# Altium PCB Main_Test.PcbDoc
Units mm, origin at the board's own origin, x right, y up, seen from the top; angles counter-clockwise.
Board outline 57 x 48 mm, 2 copper layers (Top Layer, Bottom Layer), stack 1.569 mm thick; 34 components, 29 nets, 164 pads, 0 vias.
Unrouted connection lines stored in the file: 11.
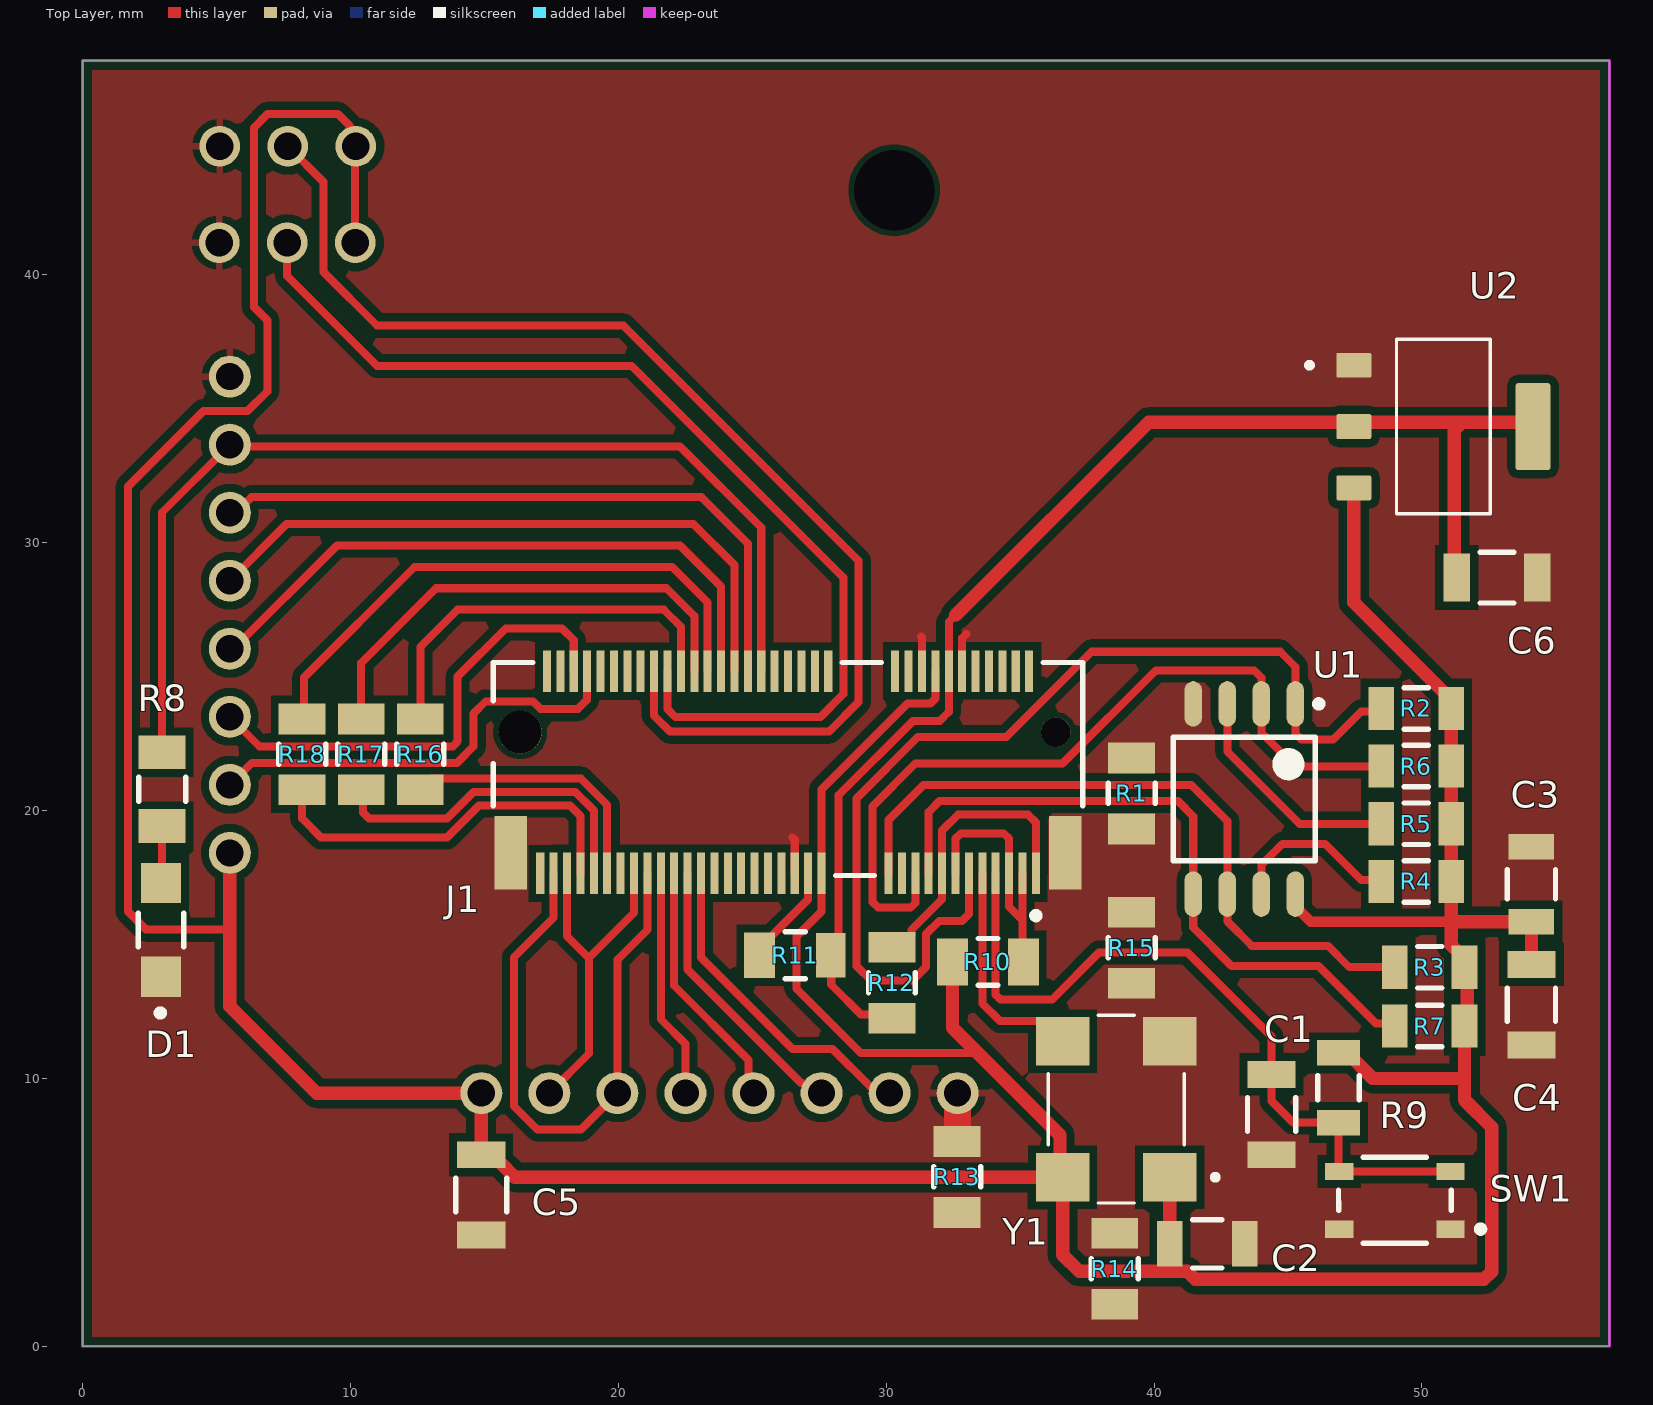
[diagram p0: Top Layer view]
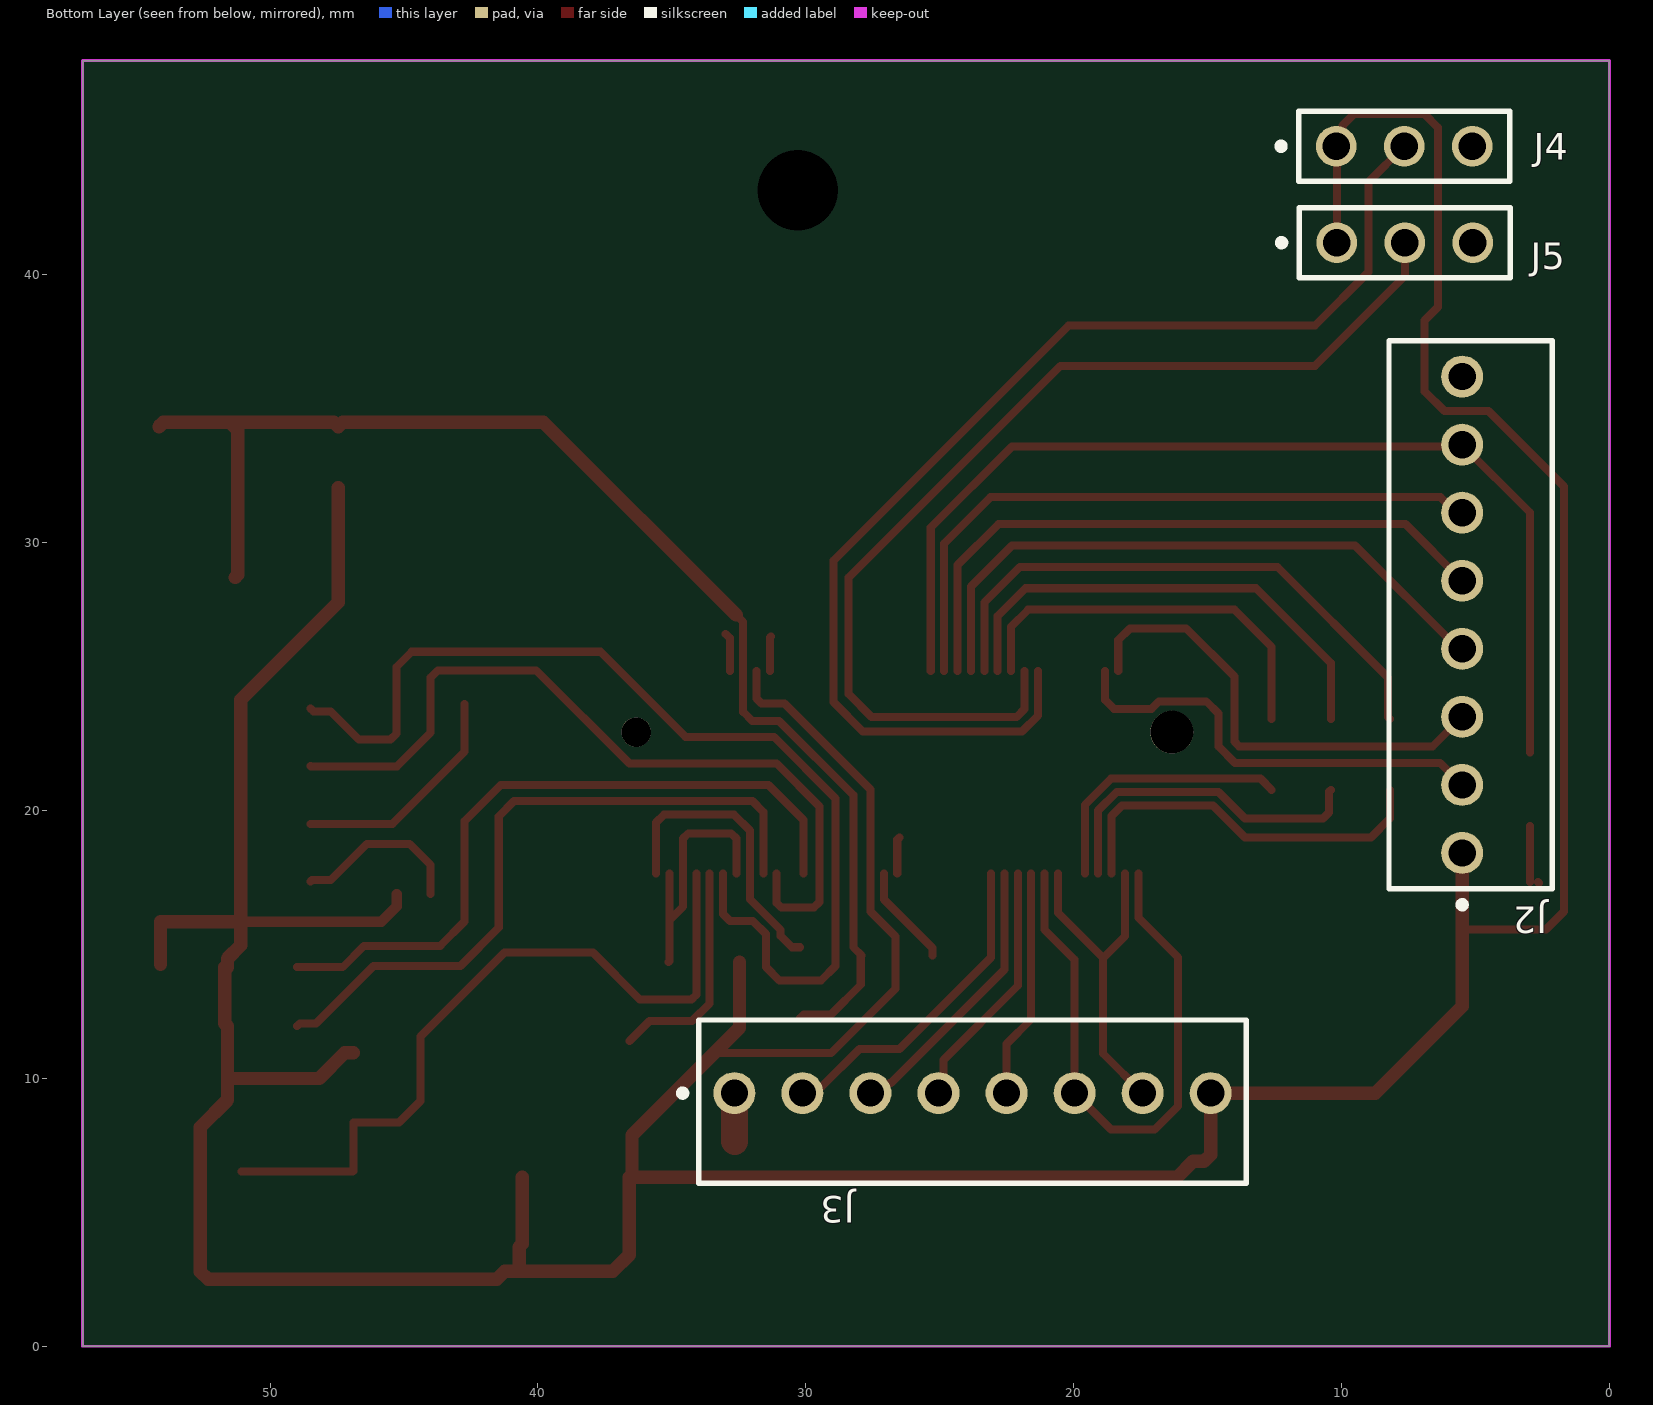
[diagram p1: Bottom Layer view, seen from below]
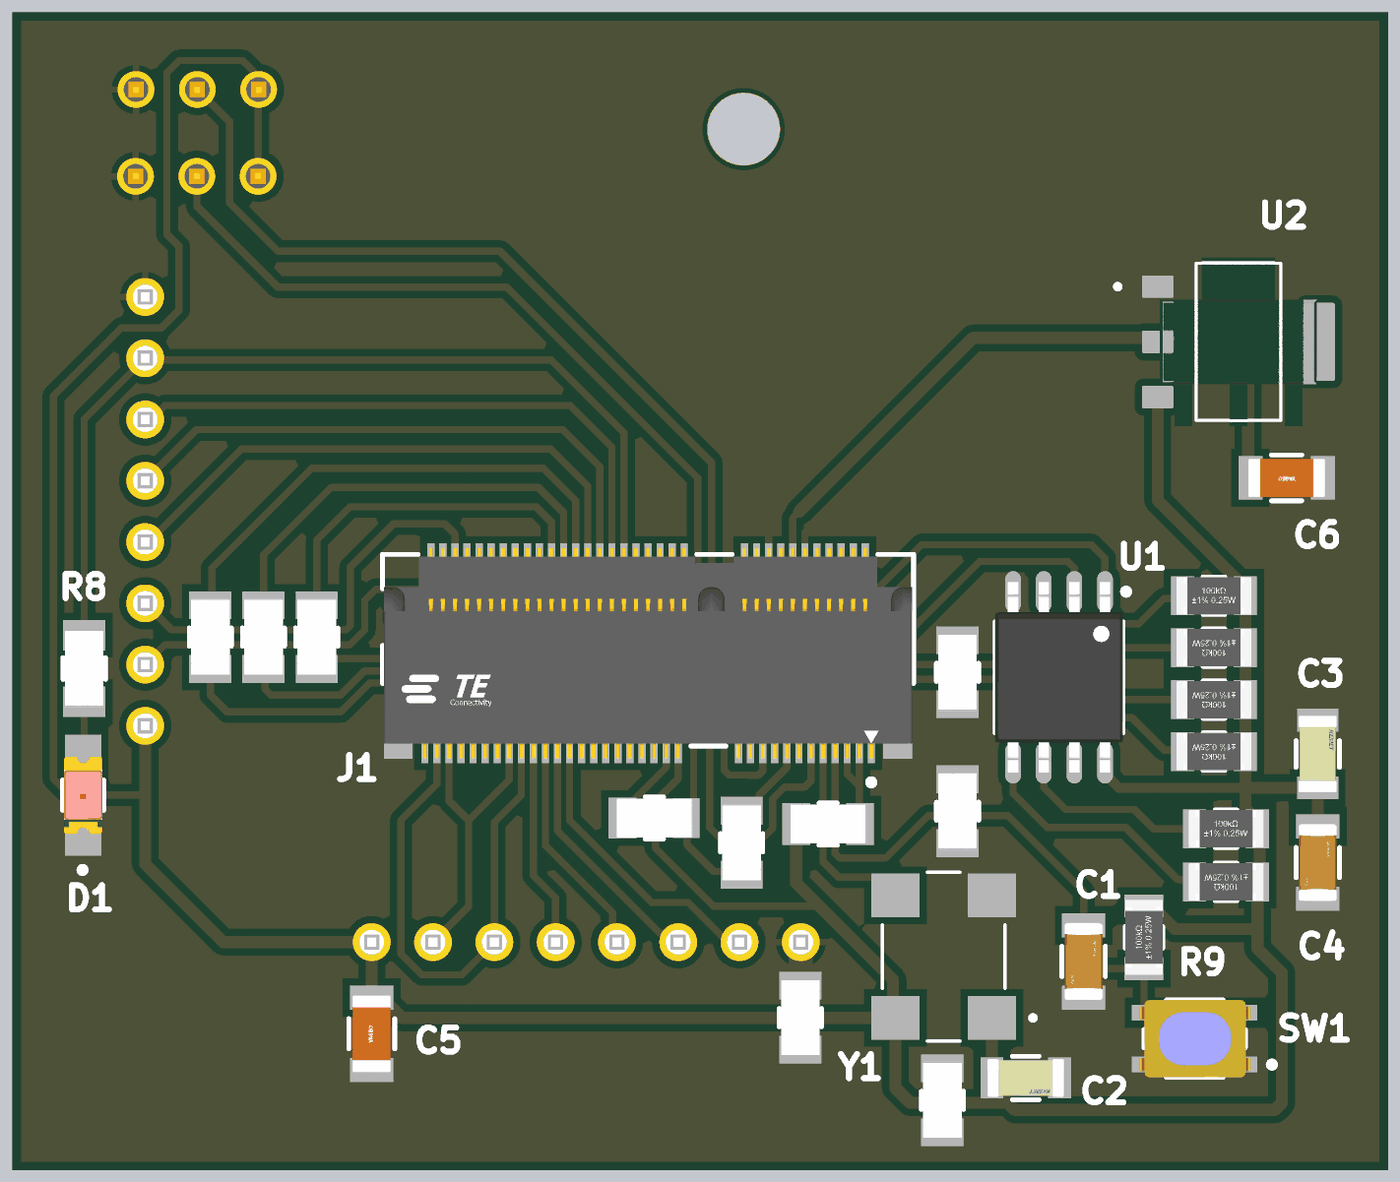
[diagram p2: 3D render of the assembled board from above, using the file's embedded part models]
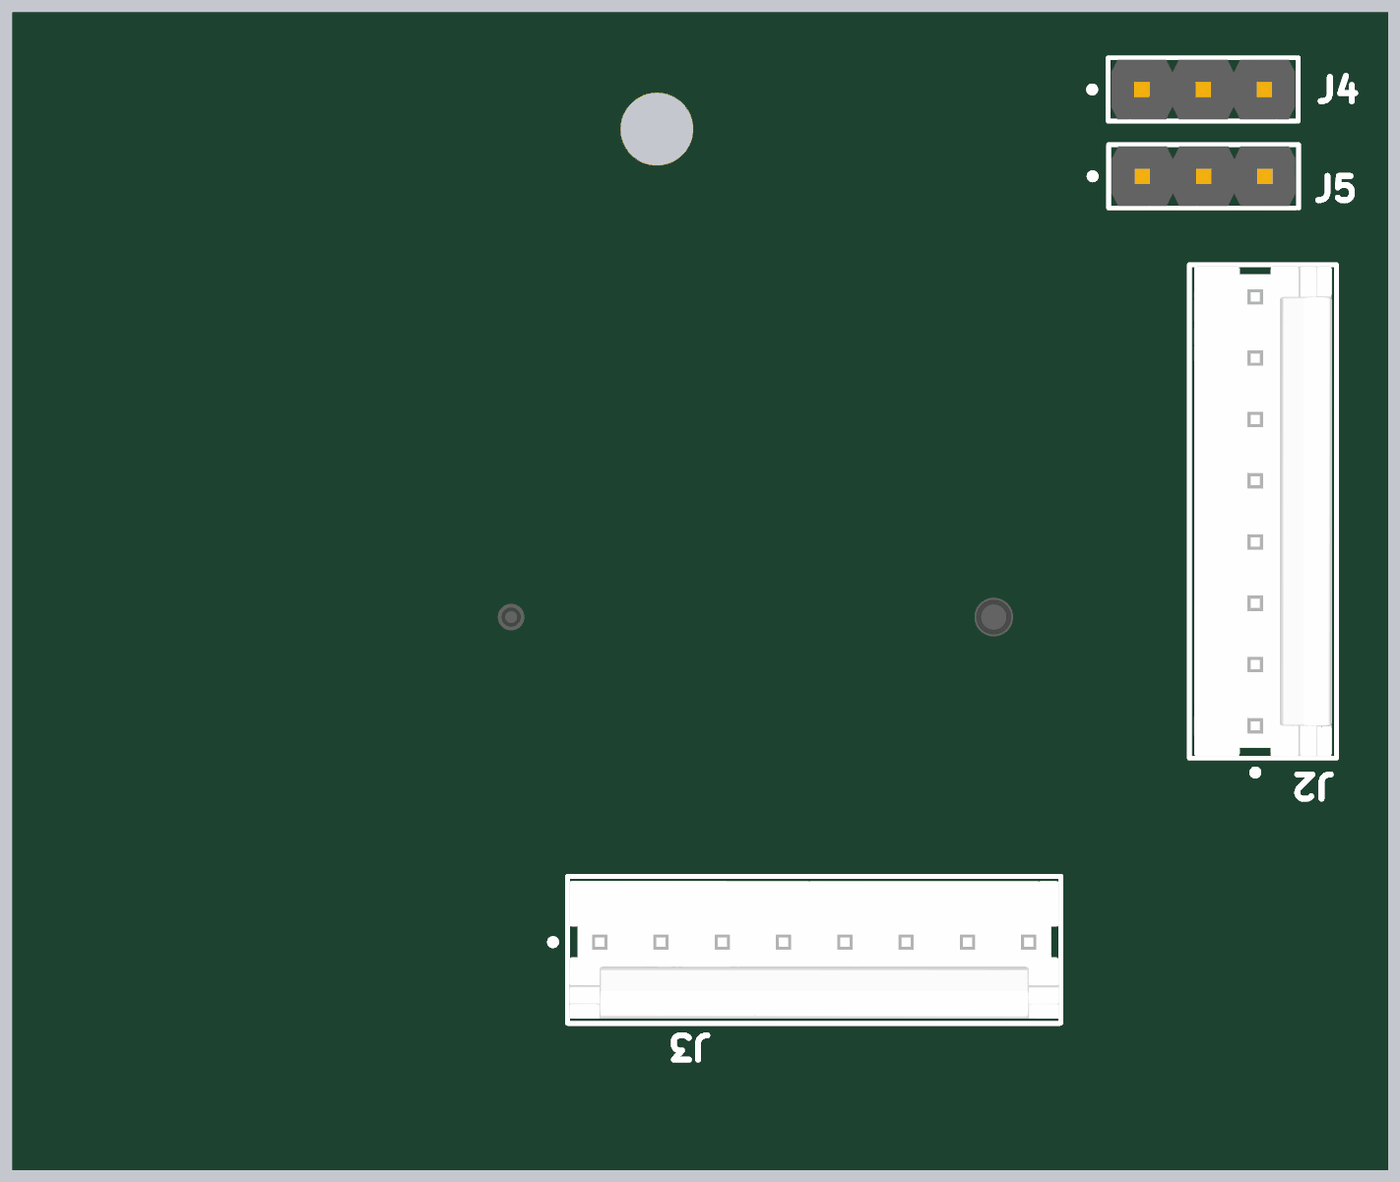
[diagram p3: 3D render of the assembled board from below, using the file's embedded part models]

## Layer stack, top to bottom
Top Solder: solder mask 0.0254, SM-002, Dk 4
Top Layer: signal copper 0.035
Dielectric 1: core 1.4986, Core-043, Dk 4.3
Bottom Layer: signal copper 0.035
Bottom Solder: solder mask 0.0254, SM-002, Dk 4

## Board outline
0,0 57,0 57,48 0,48

## Design rules (kind name [scope] priority, off if disabled: settings)
BoardOutlineClearance Clearance_Edge [All] p1: gap=0.254 ignorepadtopadclearanceinfootprint=FALSE except(0: Arc-SplitContinuation Track-SplitContinuation SMDPad-SplitContinuation THPad-SplitContinuation Via-SplitContinuation Fill-OutlineEdge Fill-CavityEdge Fill-CutoutEdge Fill-SplitBarrior Fill-SplitContinuation Poly-OutlineEdge Poly-CavityEdge Poly-CutoutEdge Poly-SplitBarrior Poly-SplitContinuation Region-OutlineEdge Region-CavityEdge Region-CutoutEdge Region-SplitBarrior Region-SplitContinuation Text-SplitContinuation)
Clearance [All] p1: gap=0.2 ignorepadtopadclearanceinfootprint=FALSE except(0.3: Arc-Fill Arc-Poly Arc-Region Track-Fill Track-Poly Track-Region SMDPad-Fill SMDPad-Poly SMDPad-Region THPad-Fill THPad-Poly THPad-Region Fill-Fill Fill-Poly Fill-Region Poly-Poly Poly-Region Region-Region)
HoleSize [All] p1: absolutevalues=TRUE maxlimit=5 minlimit=0.025 maxpercent=80.000 minpercent=20.000
MinimumSolderMaskSliver [All] p1: minsoldermaskwidth=0.2
PolygonConnect [All] p1: thpad.connectstyle=Relief thpad.reliefconductorwidth=0.254 thpad.reliefentries=4 thpad.polygonreliefangle="90 Angle" thpad.airgapwidth=0.254 smdpad.connectstyle=Direct smdpad.reliefconductorwidth=0.254 smdpad.reliefentries=4 smdpad.polygonreliefangle="90 Angle" smdpad.airgapwidth=0.254 via.connectstyle=Direct via.reliefconductorwidth=0.254 via.reliefentries=4 via.polygonreliefangle="90 Angle" via.airgapwidth=0.254
RoutingVias [All] p1: holewidth=0.711 width=1.27 viastyle="Through Hole" minholewidth=0.711 minwidth=1.27 maxholewidth=0.711 maxwidth=1.27
SilkToSilkClearance [All] p1: silktosilkclearance=0.2
SilkToSolderMaskClearance [IsPad] p1: minsilkscreentomaskgap=0.2 clearancetoexposedcopper=TRUE
SolderMaskExpansion [All] p1: expansion=0 istentingtop=FALSE
SupplyNets "Schematic Supply Nets_2" [InNet('GND')] p1: voltage=0.000
SupplyNets "Schematic Supply Nets_1" [InNet('+1.8V')] p2: voltage=0.000
SupplyNets "Schematic Supply Nets" [InNet('+3.3V')] p3: voltage=0.000
Width [All] p1: maxlimit=5 minlimit=0.254 preferedwidth=0.254 minimp=50.000000 maximp=50.000000 favimp=50.000000
26 further rules are at their usual default settings.

## Classes and differential pairs
component class VSCPU_Test: C1 C2 C3 C4 C5 D1 J1 J2 J3 J4 J5 R1 R2 R3 R4 R5 R6 R7 R8 R9 R10 R11 R12 R13 R14 R15 R16 R17 R18 SW1 U1 Y1

## Components (designator, comment, footprint, x,y, rotation, side; value= is the part's Value field where it differs from the comment)
C1 "1uF 1206" FP-CC1206-1_25-MFG 44.387,8.654 r90 top value="1 uF"
C2 "0.1uF 1206" FP-C1206C-EB-MFG 41.987,3.825 r180 top value="0.10 μF"
C3 "0.1uF 1206" FP-C1206C-EB-MFG 54.087,17.254 r270 top value="0.10 μF"
C4 "1uF 1206" FP-CC1206-1_25-MFG 54.087,12.754 r90 top value="1 uF"
C5 "10uF 1206" FP-CC1206-FD-MFG 14.887,5.654 r90 top
C6 "10uF 1206" FP-CC1206-FD-MFG 52.8,28.7 r180 top
D1 "LED 1206" FP-LTST-C150KRKT-MFG 2.93,15.546 r90 top
J1 "2199230-4" FP-2199230-4-MFG 26.337,21.554 r180 top
J2 "640456-8" FP-640456-8-MFG 5.183,27.31 r270 bottom
J3 "640456-8" FP-640456-8-MFG 23.777,9.136 r0 bottom
J4 "MTLW-103-07-G-S-230" FP-MTLW-103-07-G-S-230-MFG 7.66,44.8 r180 bottom
J5 "MTLW-103-07-G-S-230" FP-MTLW-103-07-G-S-230-MFG 7.64,41.2 r180 bottom
R1 "0R 1206" FP-MCA1206-MFG#1 39.164,20.64 r90 top
R2 "" FP-CRGCQ1206-IPC_C 49.787,23.816 r0 top value=10KΩ
R3 "" FP-CRGCQ1206-IPC_C 50.287,14.154 r0 top value=10KΩ
R4 "" FP-CRGCQ1206-IPC_C 49.787,17.354 r180 top value=10KΩ
R5 "" FP-CRGCQ1206-IPC_C 49.787,19.508 r180 top value=10KΩ
R6 "" FP-CRGCQ1206-IPC_C 49.787,21.662 r180 top value=10KΩ
R7 "" FP-CRGCQ1206-IPC_C 50.287,11.954 r180 top value=10KΩ
R8 "100R 1206" FP-MCA1206-IPC_B 2.974,20.8 r90 top
R9 "10k 1206" FP-CRGCQ1206-IPC_C 46.887,9.654 r90 top value=10KΩ
R10 "0R 1206" FP-MCA1206-MFG#1 33.8,14.35 r0 top
R11 "0R 1206" FP-MCA1206-MFG#2 26.6,14.6 r0 top
R12 "0R 1206" FP-MCA1206-MFG#1 30.213,13.575 r90 top
R13 "0R 1206" FP-MCA1206-MFG#1 32.65,6.325 r90 top
R14 "0R 1206" FP-MCA1206-MFG#1 38.533,2.9 r90 top
R15 "0R 1206" FP-MCA1206-MFG#1 39.164,14.883 r90 top
R16 "0R 1206" FP-MCA1206-MFG#1 12.608,22.1 r90 top
R17 "0R 1206" FP-MCA1206-MFG#1 10.404,22.1 r90 top
R18 "0R 1206" FP-MCA1206-MFG#1 8.2,22.1 r90 top
SW1 "PTS810 SJG 250 SMTR LFS" FP-PTS810_SJG_250_SMTR_LF-MFG 48.987,5.454 r180 top
U1 "MX25L3233FM2I-08G" MXIC-SOP-8_N 43.368,20.433 r270 top
U2 "AMS1117-1.8" SOT229P700X180-4N 50.8,34.336 r0 top
Y1 "ASV-10.000MHZ-E-T" XTAL_ASV-10.000MHZ-E-T 38.587,8.854 r180 top

## Footprints (in the part's own frame and the unit in brackets; to place one, negate y for a bottom-side part, rotate by r counter-clockwise, add the part's x,y. Pads: shape width x height; smd on the part's side, far side on the other; paste and mask are expansions set on the pad)
FP-640456-8-MFG [mil]
  round 61.65 hole 40 paste-99999 mask+0: 1(350,-12.5) 2(250,-12.5) 3(150,-12.5) 4(50,-12.5) 5(-50,-12.5) 6(-150,-12.5) 7(-250,-12.5) 8(-350,-12.5)
  silkscreen extent -402,-120 431,120, body extent -400,-113 400,113, height 415
FP-2199230-4-MFG [mm]
  rect 0.3x1.55 smd paste+0 mask+0: 1(-9.25,3.9) 2(-9,-3.65) 3(-8.75,3.9) 4(-8.5,-3.65) 5(-8.25,3.9) 6(-8,-3.65) 7(-7.75,3.9) 8(-7.5,-3.65) 9(-7.25,3.9) 10(-7,-3.65) 11(-6.75,3.9) 12(-6.5,-3.65) 13(-6.25,3.9) 14(-6,-3.65) 15(-5.75,3.9) 16(-5.5,-3.65) 17(-5.25,3.9) 18(-5,-3.65) 19(-4.75,3.9) 20(-4.5,-3.65) 21(-4.25,3.9) 22(-4,-3.65) 23(-3.75,3.9) 32(-1.5,-3.65) 33(-1.25,3.9) 34(-1,-3.65) 35(-0.75,3.9) 36(-0.5,-3.65) 37(-0.25,3.9) 38(0,-3.65) 39(0.25,3.9) 40(0.5,-3.65) 41(0.75,3.9) 42(1,-3.65) 43(1.25,3.9) 44(1.5,-3.65) 45(1.75,3.9) 46(2,-3.65) 47(2.25,3.9) 48(2.5,-3.65) 49(2.75,3.9) 50(3,-3.65) 51(3.25,3.9) 52(3.5,-3.65) 53(3.75,3.9) 54(4,-3.65) 55(4.25,3.9) 56(4.5,-3.65) 57(4.75,3.9) 58(5,-3.65) 59(5.25,3.9) 60(5.5,-3.65) 61(5.75,3.9) 62(6,-3.65) 63(6.25,3.9) 64(6.5,-3.65) 65(6.75,3.9) 66(7,-3.65) 67(7.25,3.9) 68(7.5,-3.65) 69(7.75,3.9) 70(8,-3.65) 71(8.25,3.9) 72(8.5,-3.65) 73(8.75,3.9) 74(9,-3.65) 75(9.25,3.9)
  rect 1.2x2.75 smd paste+0 mask+0: 76(-10.35,3.125) 77(10.35,3.125)
  round 1.1 hole 1.1 unplated paste-2539.97 mask+0: ""(-10,-1.375)
  round 1.6 hole 1.6 unplated paste-2539.97 mask+0: ""(10,-1.375)
  silkscreen extent -11,-3.98 11,5.6, body extent -11.1,-4.52 11.1,4.77, height 0.25
FP-C1206C-EB-MFG [mm]
  rect 0.95x1.7 smd paste+0 mask+0: 1(-1.4,0) 2(1.4,0)
  silkscreen extent -0.55,-0.9 0.55,0.9, body extent -2,-1 2,1, height 0.25
FP-CC1206-1_25-MFG [mm]
  rect 1x1.8 smd paste+0 mask+0: 1(-1.5,0) 2(1.5,0)
  silkscreen extent -0.63,-0.9 0.63,0.9, body extent -2.2,-1.25 2.2,1.25, height 0.25
FP-CC1206-FD-MFG [mm]
  rect 1x1.8 smd paste+0 mask+0: 1(-1.5,0) 2(1.5,0)
  silkscreen extent -0.63,-0.95 0.63,0.95, body extent -2.32,-1.37 2.32,1.37, height 0.25
FP-CRGCQ1206-IPC_C [mm]
  rect 0.956x1.61 smd paste+0 mask+0: 1(-1.301,0) 2(1.301,0)
  silkscreen extent -0.45,-0.77 0.45,0.77, body extent -1.88,-0.95 1.88,0.95, height 0.25
FP-LTST-C150KRKT-MFG [mm]
  rect 1.5x1.5 smd paste+0 mask+0: 1(-1.75,0) 2(1.75,0)
  silkscreen extent -3.22,-0.85 0.63,0.85, body extent -2.6,-0.95 2.6,0.95, height 0.25
FP-MCA1206-IPC_B [mm]
  rect 1.256x1.758 smd paste+0 mask+0: 1(-1.376,0) 2(1.376,0)
  silkscreen extent -0.45,-0.88 0.45,0.88, body extent -2.25,-1.13 2.25,1.13, height 0.25
FP-MCA1206-MFG#1 [mm]
  rect 1.15x1.75 smd paste+0 mask+0: 1(-1.325,0) 2(1.325,0)
  silkscreen extent -0.38,-0.87 0.38,0.87, body extent -2,-0.97 2,0.97, height 0.25
FP-MCA1206-MFG#2 [mm]
  rect 1.15x1.7 smd paste+0 mask+0: 1(-1.325,0)
  rect 1.1x1.65 smd paste+0 mask+0: 2(1.325,0)
  silkscreen extent -0.38,-0.87 0.38,0.87, body extent -2,-0.97 2,0.97, height 0.25
FP-MTLW-103-07-G-S-230-MFG [mm]
  round 1.52 hole 1.02 paste-2539.97 mask+0: 1(-2.54,0) 2(0,0) 3(2.54,0)
  silkscreen extent -4.73,-1.31 3.94,1.31, body extent -3.81,-1.24 3.81,1.25, height 7.63
FP-PTS810_SJG_250_SMTR_LF-MFG [mm]
  rect 1.05x0.65 smd paste+0 mask+0: 1(-2.075,1.075) 2(2.075,1.075) 3(-2.075,-1.075) 4(2.075,-1.075)
  silkscreen extent -3.33,-1.6 2.1,1.6, body extent -2.7,-1.7 2.7,1.7, height 0.25
MXIC-SOP-8_N [mm] "SOP, 8-Leads, Body 5.4x5.3mm, Pitch 1.27mm, IPC Medium Density"
  oval 1.7x0.65 smd: 1(-3.55,1.905) 2(-3.55,0.635) 3(-3.55,-0.635) 4(-3.55,-1.905) 5(3.55,-1.905) 6(3.55,-0.635) 7(3.55,0.635) 8(3.55,1.905)
  silkscreen extent -3.67,-2.65 2.3,2.91, body extent -3.95,-2.65 3.95,2.65, height 2.16
SOT229P700X180-4N [mm]
  rrect15% 1.31x0.93 smd: 1(-3.345,2.29) 2(-3.345,0) 3(-3.345,-2.29)
  rrect15% 1.31x3.24 smd: 4(3.345,0)
  silkscreen extent -5.1,-3.25 1.75,3.25, body extent -3.25,-3.5 3.25,3.5, height 1.8
XTAL_ASV-10.000MHZ-E-T [mm]
  rect 2x1.8 smd: 1(-2,2.54) 2(-2,-2.54) 3(2,-2.54) 4(2,2.54)
  silkscreen extent -3.8,-3.5 2.54,3.5

## Part data
C1 C4: library part CMP-03422-001171-1, "CAP CER 1UF 10V X7R 1206 / CC1206KKX7R6BB105", Capacitance="1 uF", Manufacturer=Yageo, Manufacturer Part Number=CC1206KKX7R6BB105, Package=CC1206-1.25, Temperature="-55°C to +125°C", Temperature Characteristic=X7R, Temperature Coefficient=15%, Temperature Range High=+125°C, Temperature Range Low=-55°C, Tolerance=0.1, Voltage Rating="10 V", Automotive=No, Automotive Grade=NA, Category=Cap, ComponentLink2Description=Datasheet, ComponentLink2URL=http://www.yageo.com/documents/recent/UPY-NP0X7R_HV_1KV-to-3KV_11.pdf, Device Class L1="Passive Components", Device Class L2=Capacitors, Device Class L3="Ceramic Capacitors", Digikey Description="CAP CER 1UF 10V X7R 1206", Footprint Url=http://www.yageo.com/exep/pages/download/literatures/UPY-C_GEN_24.pdf, Height=1.45mm, Lead Free=Yes, Material=Ceramic, Mouser Description="Multilayer Ceramic Capacitors MLCC - SMD/SMT 1.0uF 10V X7R 10%", Octopart=https://octopart.com/cc1206kkx7r6bb105-yageo-21769912, RoHS=TRUE
C2 C3: library part CMP-1037-04220-3, "CAP CER 0.1UF 200V X7R 1206 / C1206C104J2RACTU", Capacitance="0.10 μF", Manufacturer=KEMET, Manufacturer Part Number=C1206C104J2RACTU, Package=C1206C-EB, Temperature="-55°C to +150°C", Temperature Characteristic=X7R, Temperature Coefficient=15%, Temperature Range High=+150°C, Temperature Range Low=-55°C, Tolerance=0.05, Voltage Rating="200 V", Automotive=Yes, Automotive Grade="Grade 0", Category=Cap, ComponentLink2Description=Datasheet, ComponentLink2URL=https://content.kemet.com/datasheets/KEM_C1007_X8R_ULTRA_150C_SMD.pdf, Device Class L1="Passive Components", Device Class L2=Capacitors, Device Class L3="Ceramic Capacitors", Digikey Description="CAP CER 0.1UF 200V X7R 1206", Height=0.88mm, Ipc Land Pattern Name=CAPC320160X78, Lead Free=Yes, Material=Ceramic, Octopart=https://octopart.com/c1206c104j2ractu-kemet-10471706, RoHS=TRUE
C5 C6: library part CMP-03422-001420-1, "CAP CER 10UF 50V X5R 1206 / CC1206KKX5R9BB106", Capacitance=10uF, Case/Package=1206, Dielectric=X5R, Max Operating Temperature=85°C, Min Operating Temperature=-55°C, Tolerance=10%, Voltage Rating=50V, Halogen Free="Halogen Free", Lead Free="Lead Free", Length=0.126inch, Mount="Surface Mount", Packaging="Tape and Reel", RoHS Compliant=Yes, Thickness=0.075inch, Voltage Rating (DC)=50V, Width=0.063inch
D1: library part CMP-2000-06617-2, "LED RED CLEAR 1206 SMD / LTST-C150KRKT", Case Code (Imperial)=1206, Case Code (Metric)=3216, Color=Red, Forward Current=30mA, Forward Voltage=2V, Lens Color=Colorless, Max Operating Temperature=85°C, Min Operating Temperature=-30°C, Package Quantity=1, Power Dissipation=62.5mW, Power Rating=75mW, Reverse Voltage=5V, Test Current=20mA, Case/Package=1206, Depth=1.6mm, Dominant Wavelength=631nm, Height=1.1mm, Illumination Color=Red, Lead Free="Lead Free", Length=3.2mm, Lens Style=Diffused, Lens Transparency=Clear, Luminous Intensity=54mcd, Mount="Surface Mount", Number of Elements=1, Number of LEDs=1, Number of Pins=2, Packaging="Tape and Reel", Radiation Hardening=No, Viewing Angle=130°, Wavelength=639nm, Width=1.6mm
J1: library part CMP-03365-000002-1, "CONN FEMALE 67POS 0.020 GOLD", Current Rating=0.5A, Manufacturer="TE Connectivity", Package=0, Temperature="-40°C to +80°C", Temperature Range High=+80°C, Temperature Range Low=-40°C, Voltage Rating=50V, Automotive=No, Category=Conn, ComponentLink2Description=Datasheet, ComponentLink2URL=https://www.te.com/commerce/DocumentDelivery/DDEController?Action=showdoc&DocId=Customer+Drawing%7F2199230%7FB3%7Fpdf%7FEnglish%7FENG_CD_2199230_B3.pdf%7F2199230-4, Conn Gender=Female, Conn Orientation="Right Angle", Contact Material=Gold,Nickel, Device Class L1=Connectors, Device Class L2="Card Edge Connectors", Device Class L3=unset, Digikey Description="CONN FEMALE 67POS 0.020 GOLD", Height=4.2mm, Is Female=yes, Lead Free=Yes, Manufacturer Part Number=2199230-4, Mouser Description="PCI Express / PCI Connectors .5PITCH 4.2H KEY E EMBOSS NGFF MINICARD", Number Of Contacts=67, Number Of Rows=2, Octopart=https://octopart.com/2199230-4-te+connectivity-46436156, Pitch=0.5mm, RoHS=TRUE
J2 J3: library part CMP-03369-000098-1, "CONN HEADER VERT 8POS 2.54MM", RoHS Compliant=Yes
J4 J5: library part CMP-02766-001679-1, "CONN HEADER VERT 3POS 2.54MM", Housing Color=Black, Max Current Rating=3A, Max Operating Temperature=125°C, Min Operating Temperature=-55°C, Contact Material=Bronze, Contact Plating=Gold, Depth=2.48mm, Gender=Male, Housing Material=Polymer, Length=7.62mm, Number Of Contacts=3, Number Of Rows=1, Orientation=Straight, Packaging=Bulk, Pitch=2.54mm, Radiation Hardening=No, RoHS Compliant=Yes, Termination=Solder
R1 R10 R11 R12 R13 R14 R15 R16 R17 R18: library part CMP-02407-001388-1, "Res MC Professional Thin Film 1206 0Ω Jumper 0.4W Molded Paper T/R / MCA12060Z0000ZP500"
R2 R3 R4 R5 R6 R7 R9: library part CMP-03211-010884-1, "CRGCQ1206 10KΩ 0.25W 1% ±100ppm/°C 200VCRGCQ1206F10K", Ambient Temperature Range High=+70°C, Manufacturer="TE Connectivity", Manufacturer Part Number=CRGCQ1206F10K, Package=CRGCQ1206, Power Rating=0.25W, Resistance=10KΩ, Temperature="-55°C to +155°C", Temperature Coefficient=±100ppm/°C, Temperature Range High=+155°C, Temperature Range Low=-55°C, Tolerance=0.01, Voltage Rating=200V, Automotive=Yes, Automotive Grade="Grade 913", Category=Res, ComponentLink2Description=Datasheet, ComponentLink2URL=https://www.te.com/commerce/DocumentDelivery/DDEController?Action=showdoc&DocId=Data+Sheet%7F1773204-3%7F1%7Fpdf%7FEnglish%7FENG_DS_1773204-3_1.pdf%7F4-2176347-922, Composition="Thick Film", Device Class L1="Passive Components", Device Class L2=Resistors, Device Class L3="Chip SMD Resistors", Height=0.65mm, Ipc Land Pattern Name=RESC310155X55, Lead Free=Yes, Octopart=https://octopart.com/crgcq1206f10k-te+connectivity-91018244, RoHS=TRUE, Series=CRGCQ
R8: library part CMP-02407-009304-1, "Res MC AT Professional Thin Film 1206 100Ω 0.5% 0.4W ±25ppm/°C Molded Paper T/R / MCA1206MD1000DP500", Case Code (Imperial)=1206, Case Code (Metric)=3216, Max Operating Temperature=175°C, Min Operating Temperature=-55°C, Power Rating=400mW, Resistance=100R, Tolerance=0.5%, Voltage Rating=200V, Case/Package=1206, Composition="Thin Film", Height=0.55mm, Length=3.2mm, Packaging="Tape and Reel", Weight=0.000325oz, Width=1.6mm
SW1: library part CMP-10040-000011-1, "SWITCH TACTILE SPST-NO 0.05A 16V", Contact Resistance=500mΩ, Current Rating=50mA, Manufacturer="C&K Components", Operating Force=400gf, Temperature="-40°C to +85°C", Temperature Range High=+85°C, Temperature Range Low=-40°C, Voltage Rating Dc=16V, Automotive=No, Category=Switch, ComponentLink2Description=Datasheet, ComponentLink2URL=https://www.ckswitches.com/media/1476/pts810.pdf, Device Class L1=Electromechanical, Device Class L2=Switches, Device Class L3="Tactile Switches", Digikey Description="SWITCH TACTILE SPST-NO 0.05A 16V", Electromechanical Life=100000Cycles, Height=2.7mm, Lead Free=Yes, Manufacturer Part Number="PTS810 SJG 250 SMTR LFS", Mouser Description="Switch Tactile N.O. SPST Button J-Bend 0.05A 16VDC 100000Cycles 3.92N SMD T/R", Octopart=https://octopart.com/pts810sjg250smtrlfs-c%26k+components-29380277, Package="PTS810 SJG 250 SMTR LFS", RoHS=TRUE, Throw Configuration=SPST-NO
U1: library part CMP-2000-05278-1, "CMOS MXSMIO(R) (Serial Multi I/O) Flash Memory, 32 Mbits (x1/x2/x4), 3 V, -40 to 85 degC, 8-Pin SOP", Manufacturer=Macronix, Package Description="8-Pin Small Outline Package, Body 5.23 x 5.28 mm, Pitch 1.27 mm", Package Reference=SOP-8, Datasheet URL=http://datasheet.octopart.com/MX25L3233FM2I-08G-Macronix-datasheet-38883555.pdf, Datasheet Version="Rev. 1.1, 01/2015", Manufacturer URL=http://www.macronix.com
U2: library part CMP-031-000000-1, Package=None, Availability=Unavailable, Component Type=Standard, Design Item ID=AMS1117-1.8, MP=AMS1117-1.8, Pin Count=3, Price=None, Source=AMS1117-1.8.SchLib
Y1: library part CMP-033-000000-1, Package=None, Availability=Unavailable, Component Type=Standard, Design Item ID=ASV-10.000MHZ-E-T, MP=ASV-10.000MHZ-E-T, Pin Count=4, Price=None, Source=ASV-10.000MHZ-E-T.SchLib

## Free pads (board coordinates)
  round 0 hole 3: 2(30.297,43.156)

## Nets (pads, with @x,y where several pads share a name; then routed paths per layer and width w, separated by ;. In a path a pad name is that pad's centre, name@x,y a point inside that pad or via, vN(x,y) a via of type N, cw(c..) or ccw(c..) an arc to the next point about the centre after c; other vN are vias at no path point)
+1.8V: C6.2 J1.1 J1.14 J1.15 J1.35 R11.1 R11.2 R12.1 R12.2 U2.2 U2.4 | length 64.7
  Top Layer w0.3: R11.1 25.275,14.875 27.087,16.687 J1.35 ; R12.1 30.077,12.386 29.064,12.386 27.949,13.501 27.949,14.575 R11.2 28.227,14.901 28.227,20.577 31,23.35 32,23.35 32.337,23.687 J1.14 32.337,27.037 32.6,27.3 ; R12.2 30.513,14.9 30.938,15.325 30.938,15.542 32.087,16.691 J1.15 32.087,19.254 32.687,19.854 35.287,19.854 35.587,19.554 J1.1
  Top Layer w0.5: 32.6,27.3 39.8,34.5 47.292,34.5 U2.2 47.619,34.5 51.493,34.5 ; C6.2 51.2,28.8 51.2,34.207 51.493,34.5 ; U2.4 53.982,34.5 51.493,34.5
+3.3V: C2.2 C3.2 C4.2 C5.2 J1.3 J1.5 J1.13 J1.16 J1.33 J2.1 J3.8 J4.1 J5.1 R2.2 R3.2 R4.1 R5.1 R6.1 R7.1 R9.2 R10.1 R10.2 U1.8 U2.3 Y1.1 Y1.4 | length 198.5
  Top Layer w0.3: 5.5,15.56 2.37,15.56 1.7,16.23 1.7,32.1 4.516,34.916 6.164,34.916 6.901,35.653 6.901,38.299 6.4,38.8 6.4,45.491 6.909,46 9.537,46 9.967,45.571 9.967,45.033 J4.1 ; J5.1 J4.1@10.18,44.78 ; J1.16 31.837,24.187 31.65,24 30.8,24 27.587,20.787 J1.33 27.587,16.237 26.65,15.3 26.65,13.35 29.052,10.948 33.425,10.948 ; J1.13 32.587,18.954 32.787,19.154 34.387,19.154 34.587,18.954 J1.5 34.587,16.413 35.087,15.913 ; J1.3 35.087,15.913 ; R10.2 35.087,14.388 35.087,15.913
  Top Layer w0.4: U1.8 45.273,16.425 45.844,15.854 51.088,15.854
  Top Layer w0.5: J2.1 5.5,15.56 5.5,12.7 8.746,9.454 J3.8 C5.2 15.137,6.904 15.546,6.904 16.136,6.314 Y1.4 ; R10.1 32.475,11.898 33.425,10.948 36.487,7.886 36.487,6.414 Y1.4 ; Y1.1 C2.2 40.7,3.712 40.7,2.8 ; R9.2 47.214,10.955 48.169,10 51.588,10 ; U2.3 47.455,27.775 51.088,24.143 R6.1 R4.1 51.088,15.854 ; R3.2 51.588,14.481 51.088,14.981 51.088,15.854 ; R3.2@51.687,14.154 51.687,12.053 R7.1 51.588,10 ; C4.2 C3.2 51.088,15.854 ; Y1.4 36.587,3.413 37.2,2.8 40.7,2.8 ; 40.7,2.8 41.237,2.8 41.537,2.5 52.307,2.5 52.6,2.793 52.6,8.186 51.588,9.198 51.588,10
CLK: J1.9 Y1.3 | length 8.4
  Top Layer w0.3: J1.9 33.587,12.8 34.243,12.144 35.837,12.144 Y1.3
CS: J1.55 J3.4 | length 9.4
  Top Layer w0.3: J1.55 22.087,13.463 24.863,10.687 24.863,9.638 J3.4
GND: C1.1 C2.1 C3.1 C4.1 C5.1 C6.1 D1.1 J1.12 J1.18 J1.37 J1.76 J1.77 J2.8 J3.1 J4.3 J5.3 R1.1 R1.2 R13.1 R13.2 R14.1 R14.2 R15.1 R15.2 SW1.1 SW1.2 U1.4 U2.1 Y1.2 | length 6
  Top Layer w0.3: 26.5,19 26.587,18.913 J1.37 ; 31.3,26.5 31.337,26.463 J1.18 ; J1.12 32.837,26.437 33,26.6
  Top Layer w1: R13.2 32.659,7.659 32.659,9.445 J3.1
GPIO_IN_0: J1.68 J2.2 | length 16.7
  Top Layer w0.3: J2.2 6.319,21.779 13.979,21.779 14.6,22.4 14.6,23.624 15.055,24.079 16.813,24.079 17.092,23.8 18.5,23.8 18.837,24.137 J1.68
GPIO_IN_1: J1.70 J2.3 | length 17.9
  Top Layer w0.3: J2.3 6.6,22.4 13.824,22.4 14,22.576 14,25 15.8,26.8 17.9,26.8 18.337,26.363 J1.70
GPIO_OUT_0: J1.42 J2.7 R8.2 | length 39
  Top Layer w0.3: R8.2 2.974,31.134 J2.7 5.566,33.594 22.306,33.594 25.337,30.563 J1.42
GPIO_OUT_1: J1.44 J2.6 | length 25.1
  Top Layer w0.3: J2.6 5.729,31.12 6.309,31.7 23.1,31.7 24.837,29.963 J1.44
GPIO_OUT_2: J1.46 J2.5 | length 24.3
  Top Layer w0.3: J2.5 7.62,30.7 22.8,30.7 24.337,29.163 J1.46
GPIO_OUT_3: J1.48 J2.4 | length 23.7
  Top Layer w0.3: J2.4 5.64,26.04 9.5,29.9 22.3,29.9 23.837,28.363 J1.48
NetD1_2: D1.2 R8.1 | length 2.1
  Top Layer w0.3: D1.2@2.63,17.296 D1.2@2.674,17.34 ; D1.2@2.974,17.34 R8.1
NetR4_2: R4.2 U1.7 | length 6.5
  Top Layer w0.3: U1.7 44.003,17.969 44.787,18.754 46.387,18.754 47.734,17.407 48.433,17.407 R4.2
NetR5_2: R5.2 U1.3 | length 8.6
  Top Layer w0.3: U1.3 42.733,22.208 44.187,20.754 45.433,19.508 R5.2
P11: J1.11 R2.1 U1.1 | length 39.1
  Top Layer w0.3: J1.11 33.087,16.137 32.827,15.877 31.98,15.877 31.492,15.389 31.492,14.157 30.985,13.65 29.442,13.65 28.887,14.205 28.887,20.454 31.187,22.754 34.487,22.754 37.663,25.93 44.711,25.93 45.273,25.368 U1.1 45.273,22.884 45.503,22.654 46.687,22.654 47.734,23.7 48.371,23.7 R2.1
P17: J1.17 R7.2 U1.5 | length 25.8
  Top Layer w0.3: J1.17 31.587,19.954 31.987,20.354 40.887,20.354 41.463,19.778 41.463,15.637 42.896,14.204 46.137,14.204 48.287,12.054 48.886,12.054 R7.2
P19: J1.19 R6.2 U1.2 | length 30.2
  Top Layer w0.3: J1.19 31.087,16.554 30.91,16.377 30.494,16.377 30.492,16.379 29.702,16.379 29.487,16.594 29.487,20.154 31.087,21.754 36.587,21.754 40.07,25.237 43.735,25.237 44.003,24.969 U1.2 44.003,22.914 45.263,21.654 48.478,21.654 R6.2
P23: J1.23 R3.1 U1.6 | length 26.4
  Top Layer w0.3: J1.23 30.087,19.647 31.394,20.954 41.387,20.954 42.733,19.608 U1.6 42.736,16.88 42.736,15.865 43.647,14.954 46.487,14.954 47.287,14.154 R3.1
PGM_SEL_0: J1.52 J1.67 R17.1 R17.2 | length 30.8
  Top Layer w0.3: R17.1 10.474,20.705 10.474,19.926 10.7,19.7 13.6,19.7 14.6,20.7 18.393,20.7 19.087,20.006 J1.67 ; R17.2 10.404,25.504 13.2,28.3 21.8,28.3 22.837,27.263 J1.52
PGM_SEL_1: J1.50 J1.69 R18.1 R18.2 | length 36
  Top Layer w0.3: R18.1 8.2,19.7 8.9,19 13.607,19 14.8,20.193 18.193,20.193 18.587,19.799 J1.69 ; R18.2 8.263,23.488 8.263,24.963 12.4,29.1 22,29.1 23.337,27.763 J1.50
PGM_SEL_SW_0: J1.58 J4.2 | length 45
  Top Layer w0.3: J4.2 9,43.46 9,40.1 11,38.1 20.2,38.1 28.971,29.329 28.971,24.053 27.874,22.956 21.924,22.956 21.337,23.544 J1.58
PGM_SEL_SW_1: J1.56 J5.2 | length 39.5
  Top Layer w0.3: J5.2 7.64,39.96 11,36.6 20.5,36.6 28.4,28.7 28.4,24.347 27.553,23.5 22.127,23.5 21.837,23.79 J1.56
RV_RST: C1.2 J1.7 R9.1 SW1.3 SW1.4 | length 28.2
  Top Layer w0.3: J1.7 34.087,13.126 34.263,12.95 36.199,12.95 37.949,14.7 41.25,14.7 44.387,11.563 C1.2 44.387,9.154 45.188,8.353 R9.1 46.887,6.554 SW1.4 SW1.3
RV_RX: J1.59 J1.73 J3.6 | length 22.7
  Top Layer w0.3: J1.73 17.587,16 16.1,14.513 16.1,8.976 16.976,8.1 18.613,8.1 J3.6 19.967,14.434 21.087,15.554 J1.59
RV_TX: J1.61 J1.71 J3.7 | length 13
  Top Layer w0.3: J3.7 18.9,10.927 18.9,14.5 ; J1.71 18.087,15.313 18.9,14.5 ; J1.61 20.587,16.187 18.9,14.5
SCK: J1.57 J3.5 | length 8.6
  Top Layer w0.3: J1.57 21.587,12.213 22.507,11.293 J3.5
SDI: J1.53 J3.3 | length 10.5
  Top Layer w0.3: J1.53 22.587,14.063 26.82,9.83 26.868,9.83 27.244,9.454 J3.3
SDO: J1.51 J3.2 | length 12.3
  Top Layer w0.3: J1.51 23.087,14.513 26.5,11.1 28,11.1 29.404,9.696 29.885,9.696 J3.2
VSCPU_RST: J1.54 J1.65 R16.1 R16.2 | length 25
  Top Layer w0.3: R16.1 13.033,21.2 18.6,21.2 19.587,20.213 J1.65 ; R16.2 12.608,26.108 14,27.5 21.7,27.5 22.337,26.863 J1.54
pads on no net: J1. J1.2 J1.4 J1.6 J1.8 J1.10 J1.20 J1.21 J1.22 J1.32 J1.34 J1.36 J1.38 J1.39 J1.40 J1.41 J1.43 J1.45 J1.47 J1.49 J1.60 J1.62 J1.63 J1.64 J1.66 J1.72 J1.74 J1.75

## Polygon pours and split planes (outlines as drawn)
GND on Top Layer "GND_L01_P000" (solid, pour order 0): 0,0 57,0 57,48 0,48

## Keep-outs
Keep-Out Layer:
  the board outline again, w0.1